# EAGLE board beeb816_mk2b (EAGLE 6.4)
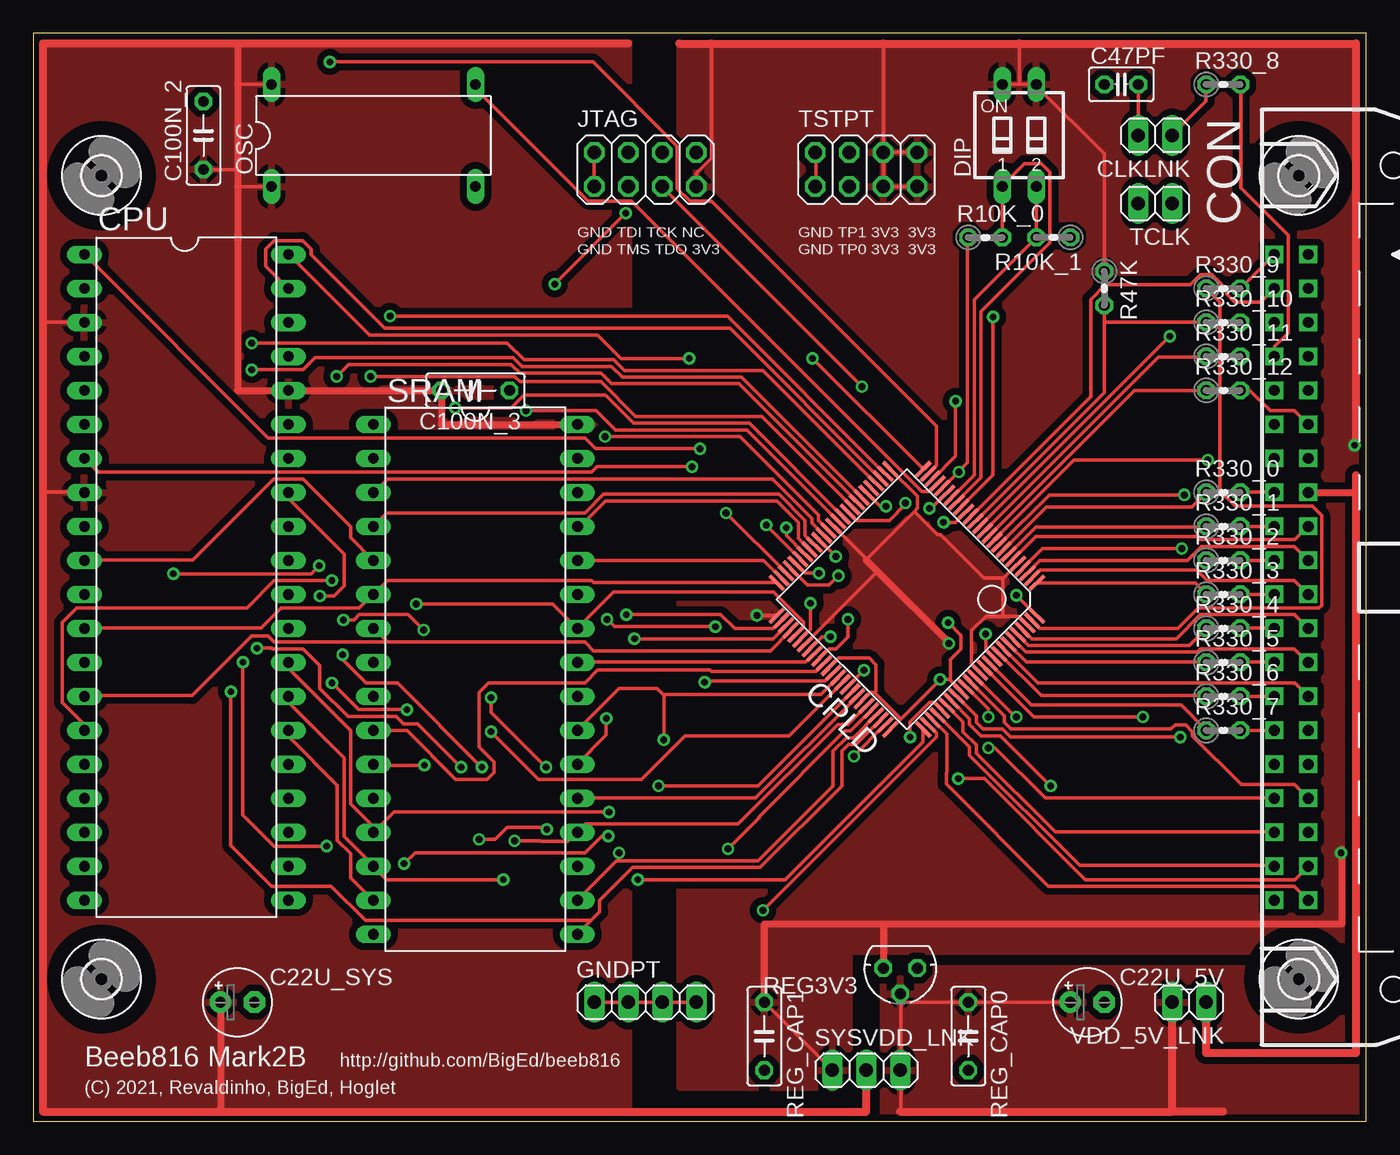
[diagram p0: board, top side]
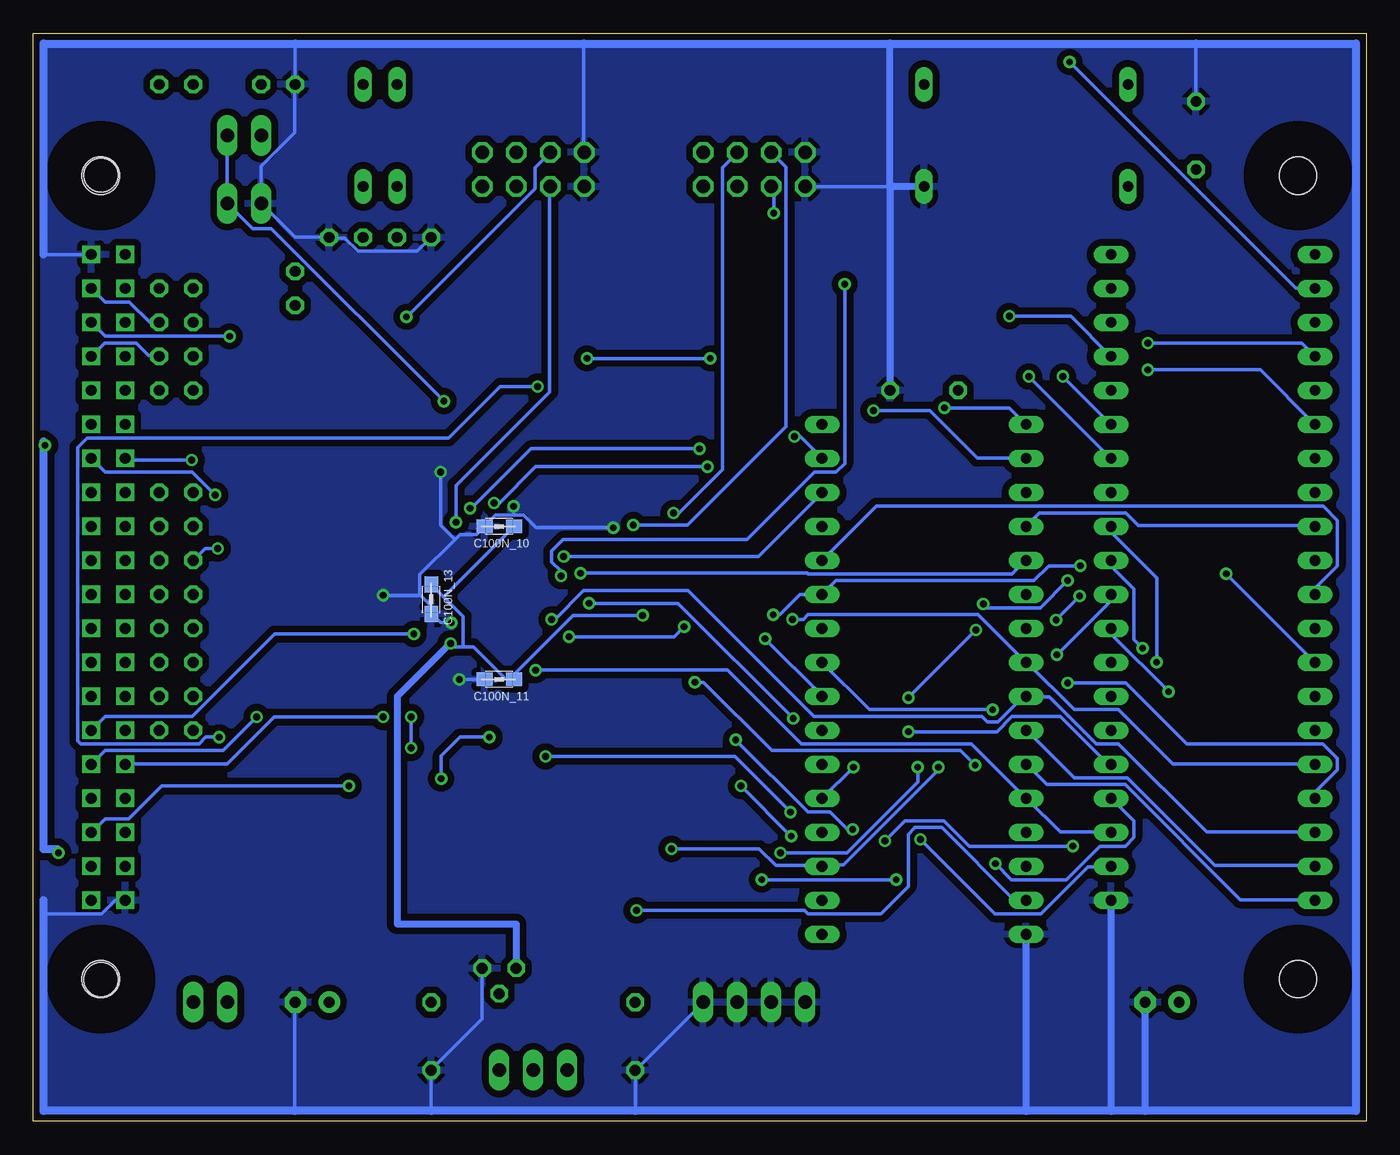
[diagram p1: board, bottom side, seen from below]

Size 99.57 x 81.28 mm. Coordinates in mm from the lower left corner, seen from the top.
Outline: 0,0 99.57,0 99.57,81.28 0,81.28 0,0
Copper layers (1*16): Top 0.035mm / dielectric 1.5mm / Bottom 0.035mm
Design rules "design_rules_smd": minimum track width 10mil, minimum drill 20mil, track to track 7mil, track to pad 8mil, pad to pad 7mil, via to via 20mil, smd to smd 7mil, copper to edge 15mil, drill to drill 8mil, minimum pad ring 10mil, minimum via ring 8mil, stop-mask expansion 4mil, vias tented up to drill 0mil, thermal gap 15mil
Net classes: 0 signal: width 0.202 mm, clearance 0.2 mm; 1 supply: width 0.202 mm, clearance 0.2 mm

## Footprints (pad centres in the part's own frame; a part is rotated, then mirrored left to right if it is on the bottom)
E2,5-5 = drill 0.813 pad 1.6: + -1.27,0 | drill 0.813 pad 1.6 octagon: - 1.27,0
C025-025X050 = drill 0.813 octagon: 1 -1.27,0; 2 1.27,0
C050-025X075 = drill 0.813 octagon: 1 -2.54,0; 2 2.54,0
0805 = smd 1.2 x 1: 1 -1.1,0; 2 1.1,0
1X02 = drill 1.016 long: 1 -1.27,0; 2 1.27,0
3M_40L = drill 0.813 square: 1 -24.13,-5.08; 2 -24.13,-2.54; 3 -21.59,-5.08; 4 -21.59,-2.54; 5 -19.05,-5.08; 6 -19.05,-2.54; 7 -16.51,-5.08; 8 -16.51,-2.54; 9 -13.97,-5.08; 10 -13.97,-2.54; 11 -11.43,-5.08; 12 -11.43,-2.54; 13 -8.89,-5.08; 14 -8.89,-2.54; 15 -6.35,-5.08; 16 -6.35,-2.54; 17 -3.81,-5.08; 18 -3.81,-2.54; 19 -1.27,-5.08; 20 -1.27,-2.54; 21 1.27,-5.08; 22 1.27,-2.54; 23 3.81,-5.08; 24 3.81,-2.54; 25 6.35,-5.08; 26 6.35,-2.54; 27 8.89,-5.08; 28 8.89,-2.54; 29 11.43,-5.08; 30 11.43,-2.54; 31 13.97,-5.08; 32 13.97,-2.54; 33 16.51,-5.08; 34 16.51,-2.54; 35 19.05,-5.08; 36 19.05,-2.54; 37 21.59,-5.08; 38 21.59,-2.54; 39 24.13,-5.08; 40 24.13,-2.54 | hole 2.54: -30.048,-3.277; 30.048,-3.277
TQFP100 = smd 0.27 x 1.5: 1 -6,-7.75; 2 -5.5,-7.75; 3 -5,-7.75; 4 -4.5,-7.75; 5 -4,-7.75; 6 -3.5,-7.75; 7 -3,-7.75; 8 -2.5,-7.75; 9 -2,-7.75; 10 -1.5,-7.75; 11 -1,-7.75; 12 -0.5,-7.75; 13 0,-7.75; 14 0.5,-7.75; 15 1,-7.75; 16 1.5,-7.75; 17 2,-7.75; 18 2.5,-7.75; 19 3,-7.75; 20 3.5,-7.75; 21 4,-7.75; 22 4.5,-7.75; 23 5,-7.75; 24 5.5,-7.75; 25 6,-7.75; 51 6,7.75; 52 5.5,7.75; 53 5,7.75; 54 4.5,7.75; 55 4,7.75; 56 3.5,7.75; 57 3,7.75; 58 2.5,7.75; 59 2,7.75; 60 1.5,7.75; 61 1,7.75; 62 0.5,7.75; 63 0,7.75; 64 -0.5,7.75; 65 -1,7.75; 66 -1.5,7.75; 67 -2,7.75; 68 -2.5,7.75; 69 -3,7.75; 70 -3.5,7.75; 71 -4,7.75; 72 -4.5,7.75; 73 -5,7.75; 74 -5.5,7.75; 75 -6,7.75 | smd 1.5 x 0.27: 26 7.75,-6; 27 7.75,-5.5; 28 7.75,-5; 29 7.75,-4.5; 30 7.75,-4; 31 7.75,-3.5; 32 7.75,-3; 33 7.75,-2.5; 34 7.75,-2; 35 7.75,-1.5; 36 7.75,-1; 37 7.75,-0.5; 38 7.75,0; 39 7.75,0.5; 40 7.75,1; 41 7.75,1.5; 42 7.75,2; 43 7.75,2.5; 44 7.75,3; 45 7.75,3.5; 46 7.75,4; 47 7.75,4.5; 48 7.75,5; 49 7.75,5.5; 50 7.75,6; 76 -7.75,6; 77 -7.75,5.5; 78 -7.75,5; 79 -7.75,4.5; 80 -7.75,4; 81 -7.75,3.5; 82 -7.75,3; 83 -7.75,2.5; 84 -7.75,2; 85 -7.75,1.5; 86 -7.75,1; 87 -7.75,0.5; 88 -7.75,0; 89 -7.75,-0.5; 90 -7.75,-1; 91 -7.75,-1.5; 92 -7.75,-2; 93 -7.75,-2.5; 94 -7.75,-3; 95 -7.75,-3.5; 96 -7.75,-4; 97 -7.75,-4.5; 98 -7.75,-5; 99 -7.75,-5.5; 100 -7.75,-6
DIL40 = drill 0.813 long: 1 -24.13,-7.62; 2 -21.59,-7.62; 3 -19.05,-7.62; 4 -16.51,-7.62; 5 -13.97,-7.62; 6 -11.43,-7.62; 7 -8.89,-7.62; 8 -6.35,-7.62; 9 -3.81,-7.62; 10 -1.27,-7.62; 11 1.27,-7.62; 12 3.81,-7.62; 13 6.35,-7.62; 14 8.89,-7.62; 15 11.43,-7.62; 16 13.97,-7.62; 17 16.51,-7.62; 18 19.05,-7.62; 19 21.59,-7.62; 20 24.13,-7.62; 21 24.13,7.62; 22 21.59,7.62; 23 19.05,7.62; 24 16.51,7.62; 25 13.97,7.62; 26 11.43,7.62; 27 8.89,7.62; 28 6.35,7.62; 29 3.81,7.62; 30 1.27,7.62; 31 -1.27,7.62; 32 -3.81,7.62; 33 -6.35,7.62; 34 -8.89,7.62; 35 -11.43,7.62; 36 -13.97,7.62; 37 -16.51,7.62; 38 -19.05,7.62; 39 -21.59,7.62; 40 -24.13,7.62
SD4-02 = drill 0.813 long: 1 -1.27,-3.81; 2 1.27,-3.81; 3 1.27,3.81; 4 -1.27,3.81
1X04 = drill 1.016 long: 1 -3.81,0; 2 -1.27,0; 3 1.27,0; 4 3.81,0
2,8 = hole 2.8: 0,0
2X04 = drill 1.016 octagon: 1 -3.81,-1.27; 2 -3.81,1.27; 3 -1.27,-1.27; 4 -1.27,1.27; 5 1.27,-1.27; 6 1.27,1.27; 7 3.81,-1.27; 8 3.81,1.27
DIL14/4 = drill 0.813 long: 1 -7.62,-3.81; 7 7.62,-3.81; 8 7.62,3.81; 14 -7.62,3.81
0204V = drill 0.813 octagon: 1 -1.27,0; 2 1.27,0
TO92-3 = drill 0.813 octagon: A1 -1.27,0; A2 1.27,0; G 0,1.905
DIL32 = drill 0.813 long: 1 -19.05,-7.62; 2 -16.51,-7.62; 3 -13.97,-7.62; 4 -11.43,-7.62; 5 -8.89,-7.62; 6 -6.35,-7.62; 7 -3.81,-7.62; 8 -1.27,-7.62; 9 1.27,-7.62; 10 3.81,-7.62; 11 6.35,-7.62; 12 8.89,-7.62; 13 11.43,-7.62; 14 13.97,-7.62; 15 16.51,-7.62; 16 19.05,-7.62; 17 19.05,7.62; 18 16.51,7.62; 19 13.97,7.62; 20 11.43,7.62; 21 8.89,7.62; 22 6.35,7.62; 23 3.81,7.62; 24 1.27,7.62; 25 -1.27,7.62; 26 -3.81,7.62; 27 -6.35,7.62; 28 -8.89,7.62; 29 -11.43,7.62; 30 -13.97,7.62; 31 -16.51,7.62; 32 -19.05,7.62
1X03 = drill 1.016 long: 1 -2.54,0; 2 0,0; 3 2.54,0

## Placement (x,y rotation side)
C22U_5V  [E2,5-5]  78.74,8.89 0 top
C22U_SYS  [E2,5-5]  15.24,8.89 0 top
C47PF  [C025-025X050]  81.28,77.47 0 top
C100N_2  [C050-025X075]  12.7,73.66 90 top
C100N_3  [C050-025X075]  33.02,54.61 180 top
C100N_10  [0805]  64.77,44.45 0 bottom
C100N_11  [0805]  64.77,33.02 0 bottom
C100N_13  [0805]  69.85,38.99 90 bottom
CLKLNK  [1X02]  83.82,73.66 180 top
CON  [3M_40L]  97.79,40.64 270 top
CPLD  [TQFP100]  65.25,39 135 top
CPU  [DIL40]  11.43,40.64 270 top
DIP  [SD4-02]  73.66,73.66 0 top
GNDPT  [1X04]  45.72,8.89 0 top
H1  [2,8]  94.54,70.66 0 top
H2  [2,8]  94.54,10.62 0 top
H3  [2,8]  5.08,70.66 0 top
H4  [2,8]  5.08,10.62 0 top
JTAG  [2X04]  45.72,71.12 0 top
OSC  [DIL14/4]  25.4,73.66 0 top
R10K_0  [0204V]  71.12,66.04 0 top
R10K_1  [0204V]  76.2,66.04 180 top
R47K  [0204V]  80.01,62.23 270 top
R330_0  [0204V]  88.9,46.99 0 top
R330_1  [0204V]  88.9,44.45 0 top
R330_2  [0204V]  88.9,41.91 0 top
R330_3  [0204V]  88.9,39.37 0 top
R330_4  [0204V]  88.9,36.83 0 top
R330_5  [0204V]  88.9,34.29 0 top
R330_6  [0204V]  88.9,31.75 0 top
R330_7  [0204V]  88.9,29.21 0 top
R330_8  [0204V]  88.9,77.47 0 top
R330_9  [0204V]  88.9,62.23 0 top
R330_10  [0204V]  88.9,59.69 0 top
R330_11  [0204V]  88.9,57.15 0 top
R330_12  [0204V]  88.9,54.61 0 top
REG3V3  [TO92-3]  64.77,11.43 180 top
REG_CAP0  [C050-025X075]  69.85,6.35 270 top
REG_CAP1  [C050-025X075]  54.61,6.35 270 top
SRAM  [DIL32]  33.02,33.02 270 top
SYSVDD_LNK  [1X03]  62.23,3.81 0 top
TCLK  [1X02]  83.82,68.58 180 top
TSTPT  [2X04]  62.23,71.12 0 top
VDD_5V_LNK  [1X02]  86.36,8.89 180 top

## Library data of the parts
C22U_5V C22U_SYS C47PF C100N_2 C100N_3 R10K_0 R10K_1 R47K R330_0 R330_1-R330_12 REG_CAP0 REG_CAP1 = resistor
C100N_10 C100N_11 C100N_13 = wuerth-elektronik
CLKLNK GNDPT JTAG SYSVDD_LNK TCLK TSTPT VDD_5V_LNK = pinhead
CON = con-harting-ml
CPLD = ref-packages
CPU OSC SRAM = ic-package
DIP = switch-dil
H1-H4 = holes
REG3V3 = triac

## Nets
BBC_A0: CON.18 CPLD.6
BBC_A1: CON.20 CPLD.3
BBC_A2: CON.22 CPLD.2
BBC_A3: CON.24 CPLD.97
BBC_A4: CON.26 CPLD.95
BBC_A5: CON.28 CPLD.93
BBC_A6: CON.30 CPLD.91
BBC_A7: CON.32 CPLD.89
BBC_A8: CON.34 CPLD.86
BBC_A9: CON.36 CPLD.82
BBC_A10: CON.38 CPLD.80
BBC_A11: CON.40 CPLD.78
BBC_A12: CON.37 CPLD.79
BBC_A13: CON.35 CPLD.81
BBC_A14: CON.33 CPLD.85
BBC_A15: CON.31 CPLD.87
BBC_D0: CON.15 R330_0.2
BBC_D1: CON.17 R330_1.2
BBC_D2: CON.19 R330_2.2
BBC_D3: CON.21 R330_3.2
BBC_D4: CON.23 R330_4.2
BBC_D5: CON.25 R330_5.2
BBC_D6: CON.27 R330_6.2
BBC_D7: CON.29 R330_7.2
BBC_IRQB: CON.8 R330_11.2
BBC_NMIB: CON.12 R330_12.2
BBC_PHI0: CON.7 R330_8.2
BBC_PHI1: CON.6 CPLD.13
BBC_PHI2: CON.3 CPLD.15
BBC_RDY: CON.4 R330_10.2
BBC_RNW: CON.13 CPLD.10
BBC_RSTB: CON.1 R330_9.2
BBC_SYNC: CON.14 CPLD.9
CPLD_D0: CPLD.8 R330_0.1
CPLD_D1: CPLD.7 R330_1.1
CPLD_D2: CPLD.4 R330_2.1
CPLD_D3: CPLD.1 R330_3.1
CPLD_D4: CPLD.96 R330_4.1
CPLD_D5: CPLD.94 R330_5.1
CPLD_D6: CPLD.92 R330_6.1
CPLD_D7: CPLD.90 R330_7.1
CPLD_IRQB: CPLD.12 R330_11.1
CPLD_NMIB: CPLD.11 R330_12.1
CPLD_PHI0: CLKLNK.1 CPLD.23 R330_8.1 TCLK.1
CPLD_PHI0_FILT: C47PF.2 CLKLNK.2
CPLD_RDY: CPLD.14 R47K.2 R330_10.1
CPLD_RSTB: CPLD.99 R330_9.1
CPU_A0: CPLD.42 CPU.9 SRAM.4
CPU_A1: CPLD.46 CPU.10 SRAM.5
CPU_A2: CPLD.49 CPU.11 SRAM.28
CPU_A3: CPLD.50 CPU.12 SRAM.6
CPU_A4: CPLD.52 CPU.13 SRAM.27
CPU_A5: CPLD.54 CPU.14 SRAM.7
CPU_A6: CPLD.55 CPU.15 SRAM.26
CPU_A7: CPLD.58 CPU.16 SRAM.8
CPU_A8: CPLD.59 CPU.17 SRAM.25
CPU_A9: CPLD.60 CPU.18 SRAM.9
CPU_A10: CPLD.61 CPU.19 SRAM.10
CPU_A11: CPLD.63 CPU.20 SRAM.11
CPU_A12: CPLD.64 CPU.22 SRAM.23
CPU_A13: CPLD.66 CPU.23 SRAM.12
CPU_A14: CPLD.67 CPU.24
CPU_A15: CPLD.65 CPU.25
CPU_D0: CPLD.68 CPU.33 SRAM.21
CPU_D1: CPLD.70 CPU.32 SRAM.20
CPU_D2: CPLD.71 CPU.31 SRAM.19
CPU_D3: CPLD.72 CPU.30 SRAM.18
CPU_D4: CPLD.73 CPU.29 SRAM.17
CPU_D5: CPLD.74 CPU.28 SRAM.13
CPU_D6: CPLD.76 CPU.27 SRAM.14
CPU_D7: CPLD.77 CPU.26 SRAM.15
CPU_E: CPLD.33 CPU.35
CPU_IRQB: CPLD.29 CPU.4
CPU_NMIB: CPLD.32 CPU.6
CPU_PHI2: CPLD.27 CPU.37
CPU_RDY: CPLD.24 CPU.2
CPU_RNW: CPLD.34 CPU.34
CPU_RSTB: CPLD.25 CPU.40
CPU_VDA: CPLD.28 CPU.39
CPU_VPA: CPLD.35 CPU.7
CPU_VPB: CPLD.20 CPU.1
DIP0: CPLD.18 DIP.1 R10K_0.2
DIP1: CPLD.19 DIP.2 R10K_1.2
GND [supply]: C22U_5V.- C22U_SYS.- C47PF.1 C100N_2.2 C100N_3.1 C100N_10.1 C100N_11.1 C100N_13.1 CON.2 CON.39 CPLD.21 CPLD.31 CPLD.44 CPLD.62 CPLD.69 CPLD.75 CPLD.84 CPLD.100 CPU.21 GNDPT.1 GNDPT.2 GNDPT.3 GNDPT.4 JTAG.1 JTAG.2 OSC.7 R10K_0.1 R10K_1.1 REG3V3.A1 REG_CAP0.2 REG_CAP1.2 SRAM.16 TCLK.2 TSTPT.1 TSTPT.2
HSCLK: CPLD.22 OSC.8
RAM_A14: CPLD.40 SRAM.3
RAM_A15: CPLD.39 SRAM.31
RAM_A16: CPLD.37 SRAM.2
RAM_A17: CPLD.41 SRAM.30
RAM_A18: CPLD.36 SRAM.1
RAM_CEB: CPLD.56 SRAM.22
RAM_OEB: CPLD.53 SRAM.24
RAM_WEB: CPLD.43 SRAM.29
TCK: CPLD.48 JTAG.6
TDI: CPLD.45 JTAG.4
TDO: CPLD.83 JTAG.5
TMS: CPLD.47 JTAG.3
TP0: CPLD.16 TSTPT.3
TP1: CPLD.17 TSTPT.4
VDD_3V3 [supply]: C100N_10.2 C100N_11.2 C100N_13.2 CPLD.5 CPLD.26 CPLD.38 CPLD.51 CPLD.57 CPLD.88 CPLD.98 DIP.3 DIP.4 JTAG.7 R47K.1 REG3V3.A2 REG_CAP1.1 SYSVDD_LNK.1 TSTPT.5 TSTPT.6 TSTPT.7 TSTPT.8
VDD_5V [supply]: C22U_5V.+ REG3V3.G REG_CAP0.1 SYSVDD_LNK.3 VDD_5V_LNK.2
VDD_5V_IN [supply]: CON.16 VDD_5V_LNK.1
VDD_SYS [supply]: C22U_SYS.+ C100N_2.1 C100N_3.2 CPU.3 CPU.8 CPU.36 OSC.1 OSC.14 SRAM.32 SYSVDD_LNK.2

## Tracks (layer width: path | path; a pad name or v marks a point on that pad's centre or on a via)
BBC_A0
  Top 0.254: CON.18 94.25,43.45 87.2,43.45 86.95,43.7 74.9,43.7 73.25,42.05 CPLD.6
BBC_A1
  Top 0.254: CPLD.3 74.25,40.95 75.2,41.9 86.2,41.9 87.25,42.95 94.2,42.95 95.2,41.95 CON.20
BBC_A2
  Top 0.254: CPLD.2 74.65,40.6 75.25,41.2 86.9,41.2 87.7,40.4 94.2,40.4 95.2,39.4 CON.22
BBC_A3
  Top 0.254: CPLD.97 73.95,36.7 74.6,36.05 85.4,36.05 87.2,37.85 94.2,37.85 95.2,36.85 CON.24
BBC_A4
  Top 0.254: CPLD.95 73.25,35.95 74.15,35.05 86.95,35.05 87.2,35.3 94.2,35.3 95.2,34.3 CON.26
BBC_A5
  Top 0.254: CON.28 94.25,32.75 75.05,32.75 CPLD.93
BBC_A6  (via drill 0.51)
  Top 0.254: v71.15,36.4 71.15,35.2 71.75,34.6 CPLD.91
  Bottom 0.254: v71.15,36.4 81.55,36.4 87.7,30.25 94.2,30.25 95.2,29.25 CON.30
BBC_A7  (via drill 0.51)
  Top 0.254: v82.9,30.2 74.75,30.2 71.1,33.85 CPLD.89
  Bottom 0.254: v82.9,30.2 85.4,27.7 94.2,27.7 95.2,26.7 CON.32
BBC_A8
  Top 0.254: CPLD.86 70.05,32.8 72.55,30.3 72.55,29.8 73.05,29.3 85,29.3 85.3,29.6 86.1,29.6 86.6,29.1 86.6,28.8 90.25,25.15 94.2,25.15 95.2,24.15 CON.34
BBC_A9  (via drill 0.51)
  Top 0.254: v76,25.05 72.25,28.8 70.8,28.8 69.95,29.65 69.95,30.05 68.65,31.35 CPLD.82
  Bottom 0.254: v76,25.05 90,25.05 92.45,22.6 94.2,22.6 95.2,21.6 CON.36
BBC_A10  (via drill 0.51)
  Top 0.254: v65.5,28.7 65.5,29.85 66.95,31.3 67.3,31.3 CPLD.80 | v69.1,25.6 71.05,25.6 78.6,18.05 94.25,18.05 CON.38
  Bottom 0.254: v65.5,28.7 67.7,28.7 69.1,27.3 v69.1,25.6
BBC_A11
  Top 0.254: CPLD.78 67.2,30 68.25,28.95 68.25,26.05 68.2,26 68.2,25.2 75.85,17.55 94.2,17.55 95.2,16.55 CON.40
BBC_A12
  Top 0.254: CPLD.79 69.95,27.95 69.95,27.35 78.2,19.1 92.7,19.1 CON.37
BBC_A13
  Top 0.254: CPLD.81 68.3,31 69.45,29.85 69.45,29.1 70.45,28.1 70.45,27.5 76.35,21.6 CON.35
BBC_A14  (via drill 0.51)
  Top 0.254: v71.35,30.2 71.35,30.8 69.7,32.45 CPLD.85 | v71.35,27.9 71.85,27.9 75.6,24.15 92.7,24.15 CON.33
  Bottom 0.254: v71.35,27.9 v71.35,30.2
BBC_A15  (via drill 0.51)
  Top 0.254: v73.45,30.2 73.35,30.2 70.4,33.15 CPLD.87
  Bottom 0.254: v73.45,30.2 81.6,30.2 85.1,26.7 92.7,26.7 CON.31
BBC_D0
  Top 0.254: R330_0.2 90.2,47 CON.15
BBC_D1
  Top 0.254: CON.17 R330_1.2
BBC_D2
  Top 0.254: R330_2.2 90.2,41.9 CON.19
BBC_D3
  Top 0.254: R330_3.2 90.2,39.35 92.7,39.35 CON.21
BBC_D4
  Top 0.254: R330_4.2 90.2,36.85 92.7,36.85 CON.23
BBC_D5
  Top 0.254: R330_5.2 90.2,34.3 CON.25
BBC_D6
  Top 0.254: CON.27 R330_6.2
BBC_D7
  Top 0.254: R330_7.2 90.2,29.2 CON.29
BBC_IRQB
  Bottom 0.254: CON.8 94.25,58.15 91.9,58.15 90.95,57.2 90.2,57.2 R330_11.2
BBC_NMIB
  Top 0.254: R330_12.2 90.2,54.6 90.9,54.6 92.4,53.1 94.2,53.1 95.2,52.1 CON.12
BBC_PHI0
  Top 0.254: CON.7 92.75,57.2 92.75,57.9 93.75,58.9 93.75,66.2 90.2,69.75 90.2,77.45 R330_8.2
BBC_PHI1  (via drill 0.51)
  Top 0.254: v84.9,58.65 70.75,44.5 CPLD.13
  Bottom 0.254: v84.9,58.65 94.2,58.65 95.2,59.65 CON.6
BBC_PHI2
  Top 0.254: CPLD.15 70.05,45.2 79,54.15 79,61.4 80.1,62.5 86.45,62.5 87.2,63.25 88.05,63.25 89.15,62.15 89.15,61.8 89.75,61.2 91.7,61.2 92.7,62.2 CON.3
BBC_RDY
  Bottom 0.254: R330_10.2 90.2,59.7 90.9,59.7 92.4,61.2 94.2,61.2 95.2,62.2 CON.4
BBC_RNW  (via drill 0.51)
  Top 0.254: v87.75,49.4 77.75,49.4 71.8,43.45 CPLD.10
  Bottom 0.254: v87.75,49.4 92.6,49.4 92.7,49.5 CON.13
BBC_RSTB
  Top 0.254: R330_9.2 90.2,62.25 92.7,64.75 CON.1
BBC_SYNC  (via drill 0.51)
  Top 0.254: v86,46.8 75.9,46.8 72.15,43.05 CPLD.9
  Bottom 0.254: v86,46.8 87.7,48.5 94.2,48.5 95.2,49.5 CON.14
CPLD_D0
  Top 0.254: CPLD.8 75.7,45.9 86.55,45.9 87.6,46.95 R330_0.1
CPLD_D1
  Top 0.254: CPLD.7 72.9,42.4 74.9,44.4 87.6,44.4 R330_1.1
CPLD_D2  (via drill 0.51)
  Top 0.254: v85.8,42.8 75.4,42.8 CPLD.4
  Bottom 0.254: v85.8,42.8 86.75,42.8 87.6,41.95 R330_2.1
CPLD_D3
  Top 0.254: R330_3.1 86.8,40.2 75,40.2 CPLD.1
CPLD_D4
  Top 0.254: R330_4.1 86.35,35.55 74.35,35.55 73.6,36.3 CPLD.96
CPLD_D5
  Top 0.254: CPLD.94 72.9,35.6 74.2,34.3 87.6,34.3 R330_5.1
CPLD_D6
  Top 0.254: CPLD.92 72.15,34.95 75.3,31.8 87.6,31.8 R330_6.1
CPLD_D7
  Top 0.254: CPLD.90 71.45,34.2 74.55,31.1 85.75,31.1 87.6,29.25 R330_7.1
CPLD_IRQB
  Top 0.254: CPLD.12 71.1,44.15 84.05,57.1 87.6,57.1 R330_11.1
CPLD_NMIB
  Top 0.254: CPLD.11 71.45,43.8 82.25,54.6 87.6,54.6 R330_12.1
CPLD_PHI0  (via drill 0.51)
  Top 0.254: R330_8.1 87.6,77.45 87.6,76.2 85.1,73.7 CLKLNK.1 | v68.9,53.8 68.9,49.7 67.2,48 CPLD.23
  Bottom 0.254: v68.9,53.8 81.8,66.7 83.2,66.7 85.05,68.55 TCLK.1 85.1,68.7 CLKLNK.1
CPLD_PHI0_FILT
  Top 0.254: CLKLNK.2 C47PF.2
CPLD_RDY
  Top 0.254: 80,59.7 R47K.2 | 80,59.7 80,54.45 70.4,44.85 CPLD.14 | 80,59.7 87.6,59.7 R330_10.1
CPLD_RSTB
  Top 0.254: CPLD.99 74.65,37.4 74.65,37.35 75.2,36.8 85.5,36.8 87.05,38.35 96.05,38.35 96.25,38.55 96.25,45.25 95.55,45.95 89.8,45.95 88.65,47.1 88.65,61.2 87.65,62.2 R330_9.1
CPU_A0
  Top 0.254: SRAM.4 26.4,45.45 41.2,45.45 42.6,46.85 55.7,46.85 57.65,44.9 57.65,43.75 58.35,43.05 CPLD.42
  Bottom 0.254: SRAM.4 24.4,45.45 17.95,45.45 17,44.5 3.85,44.5 CPU.9
CPU_A1  (via drill 0.51)
  Top 0.254: v58.7,40.95 57.65,40.95 CPLD.46 | CPU.10 3.85,41.95 11.9,41.95 17.95,48 20.15,48 23.7,44.45 23.7,43.6 25.35,41.95 SRAM.5
  Bottom 0.254: v58.7,40.95 41.75,40.95 41.7,40.9 26.45,40.9 25.45,41.9 SRAM.5
CPU_A2
  Top 0.254: CPLD.49 55.85,40.6 54.55,41.9 SRAM.28
  Bottom 0.254: SRAM.28 36.6,45.95 3.2,45.95 2.15,44.9 2.15,41.5 3.8,39.85 3.8,39.4 CPU.11
CPU_A3
  Top 0.254: CPLD.50 55.5,40.25 41.85,40.25 41.7,40.4 26.45,40.4 25.45,39.4 SRAM.6 25.3,39.3 24.35,38.35 18.5,38.35 17,36.85 3.85,36.85 CPU.12
CPU_A4  (via drill 0.51)
  Top 0.254: v44.3,37.85 51.35,37.85 52.4,36.8 55.25,36.8 55.85,37.4 CPLD.52 | v10.45,40.9 20.75,40.9 v21.35,41.5
  Bottom 0.254: v44.3,37.85 43.8,37.85 42.3,39.35 40.65,39.35 SRAM.27 40.55,39.45 39.6,40.4 24.8,40.4 23.7,41.5 v21.35,41.5 | v10.45,40.9 3.85,34.3 CPU.13
CPU_A5
  Top 0.254: 26.38,35.88 25.45,36.8 SRAM.7 | 26.38,35.88 26.45,35.8 41.2,35.8 41.85,35.15 55.05,35.15 CPLD.54 | CPU.14 3.85,31.8 11.85,31.8 16.3,36.25 17.55,36.25 18,35.8 26.3,35.8 26.38,35.88
CPU_A6  (via drill 0.51)
  Top 0.254: CPLD.55 57.55,36.95 57.55,37.3 55.3,39.55 43.35,39.55 40.65,36.85 SRAM.26 40.55,36.9 38.8,38.65 v28.6,38.65 | v22.3,40.4 18,40.4 15.95,38.35 3.25,38.35 2.15,37.25 2.15,31.3 3.8,29.65 3.8,29.25 CPU.15
  Bottom 0.254: v22.3,40.4 24.35,38.35 28.3,38.35 v28.6,38.65
CPU_A7  (via drill 0.51)
  Top 0.254: v59.55,36.2 58.9,36.2 CPLD.58 | v50.95,36.95 43.4,36.95 v42.85,37.5
  Bottom 0.254: v59.55,36.2 51.7,36.2 v50.95,36.95 | v42.85,37.5 42.05,37.5 41.7,37.85 29,37.85 25.45,34.3 SRAM.8 25.3,34.25 21.8,30.75 18.5,30.75 14.45,26.7 3.85,26.7 CPU.16
CPU_A8  (via drill 0.51)
  Top 0.254: CPLD.59 58.35,34.95 57.7,34.3 SRAM.25 | v22.3,32.75 24.3,30.75 v27.9,30.75
  Bottom 0.254: v22.3,32.75 17.95,32.75 13.4,28.2 3.25,28.2 2.15,27.1 2.15,26.25 3.8,24.6 3.8,24.15 CPU.17 | v27.9,30.75 37.1,30.75 SRAM.25
CPU_A9  (via drill 0.51)
  Top 0.254: v60.85,37.5 60.85,36.2 59.95,35.3 59.45,35.3 58.75,34.6 CPLD.60
  Bottom 0.254: v60.85,37.5 60.6,37.5 58.45,39.65 50.65,39.65 41.25,30.25 28.7,30.25 28.3,29.85 27.5,29.85 25.65,31.7 25.45,31.7 SRAM.9 25.3,31.7 23.65,31.7 20.15,28.2 18.5,28.2 11.9,21.6 3.85,21.6 CPU.18
CPU_A10
  Top 0.254: CPLD.61 59.05,34.2 58.45,33.6 50.65,33.6 50.55,33.7 42.15,33.7 41.2,32.75 34,32.75 33.3,32.05 33.3,27.95 34.4,26.85 34.4,26.05 33.9,25.55 31.55,25.55 27.9,29.2 25.45,29.2 SRAM.10
  Bottom 0.254: CPU.19 3.85,19.1 11.3,19.1 17.85,25.65 21.8,25.65 25.35,29.2 SRAM.10
CPU_A11  (via drill 0.51)
  Top 0.254: v50.15,32.8 50.25,32.9 59.15,32.9 59.75,33.5 CPLD.63 | v29.2,26.6 25.5,26.6 25.45,26.65 SRAM.11
  Bottom 0.254: v50.15,32.8 49.5,32.8 44.4,27.7 30.3,27.7 v29.2,26.6 | CPU.20 3.85,16.55 9.4,16.55 18,25.15 23.85,25.15 25.35,26.65 SRAM.11
CPU_A12  (via drill 0.51)
  Top 0.254: 47.1,31.9 47.05,31.9 46.6,32.35 43.75,32.35 40.65,29.25 SRAM.23 | 47.1,31.9 58.85,31.9 60.1,33.15 CPLD.64 | v33.3,21.05 34.5,21.05 35.4,21.95 38.2,21.95 v38.35,21.8 | 47.1,31.9 v47.1,28.5
  Bottom 0.254: v33.3,21.05 27.75,15.5 24.3,15.5 20.8,19 19.1,19 CPU.22 | v38.35,21.8 38.75,21.8 40.05,23.1 41.7,23.1 v47.1,28.5
CPU_A13  (via drill 0.51)
  Top 0.254: v62.05,33.7 60.85,32.5 CPLD.66
  Bottom 0.254: v62.05,33.7 47.7,33.7 42.2,28.2 29.5,28.2 25.45,24.15 SRAM.12 25.3,24.05 22.85,21.6 19.1,21.6 CPU.23
CPU_A14  (via drill 0.51)
  Top 0.254: v46.7,25.05 54.15,25.05 61.2,32.1 CPLD.67 | v42.95,21.3 42.45,21.3 41.2,20.05 28.5,20.05 v27.7,19.25
  Bottom 0.254: v42.95,21.3 v46.7,25.05 | v27.7,19.25 26.5,18.05 22.4,18.05 19.9,20.55 18,20.55 17.35,21.2 17.35,22.45 19,24.1 CPU.24
CPU_A15  (via drill 0.51)
  Top 0.254: v34.2,29.1 37.75,25.55 45.45,25.55 48.7,28.8 56.45,28.8 60.45,32.8 CPLD.65
  Bottom 0.254: v34.2,29.1 27.6,29.1 26.45,30.25 22.85,30.25 19.3,26.7 19.1,26.7 CPU.25
CPU_D0  (via drill 0.51)
  Top 0.254: CPLD.68 53.95,24.15 40.65,24.15 SRAM.21 | v21.4,39.25 22.45,39.25 23.2,40 23.2,42.4 19.1,46.5 19.1,46.95 CPU.33 | v23.15,37.45 23.95,37.45 24.35,37.85 28,37.85 v29.15,36.7 | v34.2,31.65 34.2,30.55 v38.3,26.45
  Bottom 0.254: v21.4,39.25 23.15,37.5 v23.15,37.45 | v34.2,31.65 v29.15,36.7 | v38.3,26.45 40.6,24.15 SRAM.21
CPU_D1  (via drill 0.51)
  Top 0.254: CPLD.70 62.2,31 60.85,29.65 60.1,29.65 52.65,22.2 41.25,22.2 SRAM.20 40.55,21.55 39.9,20.9 37.95,20.9 37.9,20.95 v35.95,20.95 | v15.65,34.3 15.65,22.9 18,20.55 v21.9,20.55
  Bottom 0.254: v15.65,34.3 15.65,40.6 19,43.95 19,44.4 CPU.32 | v21.9,20.55 29.65,20.55 31.55,22.45 34.45,22.45 v35.95,20.95
CPU_D2  (via drill 0.51)
  Top 0.254: v51.9,20.35 54.2,22.65 54.2,22.75 60.6,29.15 61.05,29.15 62.55,30.65 CPLD.71 | v16.7,35.35 17.8,35.35 17.85,35.3 20.15,35.3 21.4,34.05 21.4,32.35 23.5,30.25 27.1,30.25 27.65,29.7 28.7,29.7 v31.95,26.45
  Bottom 0.254: v51.9,20.35 45.35,20.35 44.1,19.1 40.65,19.1 SRAM.19 40.55,19.15 39.05,19.15 31.95,26.25 v31.95,26.45 | v16.7,35.35 17.35,36 17.35,39.75 19,41.4 19,41.9 CPU.31
CPU_D3  (via drill 0.51)
  Top 0.254: 43.75,19.45 43.55,19.45 40.65,16.55 SRAM.18 | 43.75,19.45 54.15,19.45 59.75,25.05 59.75,27.65 60.75,28.65 61.25,28.65 CPLD.72 | v23.1,34.85 23.1,34.5 24.85,32.75 27.2,32.75 v33.5,26.45 | 43.75,19.45 v43.75,20.05
  Bottom 0.254: v23.1,34.85 19.1,38.85 19.1,39.35 CPU.30 | v33.5,26.45 33.5,25.35 38.8,20.05 v43.75,20.05
CPU_D4  (via drill 0.51)
  Top 0.254: 41.58,14.93 40.65,14 SRAM.17 | 41.58,14.93 42.3,15.65 42.3,16.5 44.75,18.95 54.3,18.95 60.4,25.05 60.4,27.65 60.9,28.15 61.45,28.15 63.3,30 CPLD.73 | v14.75,32.1 14.75,20.6 17.8,17.55 22.25,17.55 24.8,15 41.5,15 41.58,14.93
  Bottom 0.254: v14.75,32.1 19,36.35 19,36.8 CPU.29
CPU_D5  (via drill 0.51)
  Top 0.254: v61.3,27.25 61.3,27.3 63.6,29.6 63.65,29.6 CPLD.74 | v43,23.1 26.95,23.1 25.45,21.6 SRAM.13 25.55,21.85 23.7,23.7 23.7,29.2 19.1,33.8 19.1,34.25 CPU.28
  Bottom 0.254: v61.3,27.25 47.15,27.25 v43,23.1
CPU_D6  (via drill 0.51)
  Top 0.254: v45.15,18.05 56.15,18.05 66.45,28.35 66.45,29.25 CPLD.76 | v35.1,18.05 26.4,18.05 SRAM.14 25.35,19.15 23.2,21.3 23.2,27.15 19.1,31.25 19.1,31.7 CPU.27
  Bottom 0.254: v35.1,18.05 v45.15,18.05
CPU_D7  (via drill 0.51)
  Top 0.254: v54.5,15.75 67.45,28.7 67.45,29 66.85,29.6 CPLD.77 | CPU.26 19.1,29.2 19.1,28.7 22.7,25.1 22.7,21 23.7,20 23.7,18.2 25.35,16.55 SRAM.15
  Bottom 0.254: v54.5,15.75 41.95,15.75 41.7,15.5 36.25,15.5 34.2,17.55 34.2,21.45 33.7,21.95 31.7,21.95 26.3,16.55 25.45,16.55 SRAM.15
CPU_E  (via drill 0.51)
  Top 0.254: v22.65,55.65 23.55,56.55 35.7,56.55 36.35,55.9 42.4,55.9 43.2,55.1 52.7,55.1 CPLD.33
  Bottom 0.254: v22.65,55.65 19.1,52.1 CPU.35
CPU_IRQB  (via drill 0.51)
  Top 0.254: v16.3,58.15 35.4,58.15 36.65,56.9 43.35,56.9 44.15,56.1 54.5,56.1 CPLD.29
  Bottom 0.254: v16.3,58.15 4.8,58.15 3.85,57.2 CPU.4
CPU_NMIB  (via drill 0.51)
  Top 0.254: v16.3,56.15 20.15,56.15 21.05,57.05 35.85,57.05 36.5,56.4 43.2,56.4 44,55.6 52.9,55.6 61.85,46.65 CPLD.32
  Bottom 0.254: v16.3,56.15 7.9,56.15 3.85,52.1 CPU.6
CPU_PHI2  (via drill 0.51)
  Top 0.254: v26.65,60.15 51.85,60.15 63.6,48.4 63.65,48.4 CPLD.27
  Bottom 0.254: v26.65,60.15 22.05,60.15 CPU.37
CPU_RDY  (via drill 0.51)
  Top 0.254: v22.15,79.15 41.8,79.15 48.1,72.85 48.1,69.7 49.05,68.75 50.65,68.75 67.45,51.95 67.45,49 66.85,48.4 CPLD.24
  Bottom 0.254: v22.15,79.15 5.25,62.25 3.85,62.25 CPU.2
CPU_RNW  (via drill 0.51)
  Top 0.254: v25.2,55.65 35.95,55.65 36.35,55.25 42.4,55.25 45,52.65 54.45,52.65 61.2,45.9 CPLD.34
  Bottom 0.254: v25.2,55.65 19.1,49.55 CPU.34
CPU_RSTB  (via drill 0.51)
  Top 0.254: v58.2,57 66.45,48.75 CPLD.25 | v49,57 43.9,57 42.15,58.75 25.1,58.75 19.1,64.75 CPU.40
  Bottom 0.254: v49,57 v58.2,57
CPU_VDA
  Top 0.254: CPLD.28 63.3,48 52.05,59.25 26.25,59.25 20.75,64.75 20.75,65.15 20.1,65.8 18,65.8 17.35,65.15 17.35,63.9 19,62.25 CPU.39
CPU_VPA  (via drill 0.51)
  Top 0.254: v65.15,46.2 65.15,46.1 63.95,44.9 61.45,44.9 60.85,45.5 CPLD.35 | v49.2,48.9 42.1,48.9 41.7,48.5 4.85,48.5 3.85,49.5 CPU.7
  Bottom 0.254: v65.15,46.2 64.75,46.2 62.05,48.9 v49.2,48.9
CPU_VPB  (via drill 0.51)
  Top 0.254: v66.95,45.8 67.1,45.8 CPLD.20 | v49.8,50.25 42,50.25 41.2,51.05 17.55,51.05 3.85,64.75 CPU.1
  Bottom 0.254: v66.95,45.8 66.85,45.8 62.4,50.25 v49.8,50.25
DIP0
  Top 0.254: CPLD.18 70.8,48.1 70.8,60.5 75.95,65.65 75.95,70.9 75.3,71.55 74.05,71.55 72.4,69.9 DIP.1 72.4,69.75 R10K_0.2
DIP1
  Top 0.254: CPLD.19 68.65,46.65 70.3,48.3 70.3,61.4 74.9,66 R10K_1.2 74.95,66.15 74.95,69.8 DIP.2
GND  (via drill 0.51)
  Top 0.254: 68.45,33 v67.75,33 64.83,30.07 | 68.45,33 69.3,32.15 CPLD.84 | 64.83,30.07 64.05,29.3 CPLD.75 | 62.85,32.05 62.55,32.05 CPLD.69 | 64.83,30.07 62.85,32.05 | CPLD.62 59.45,33.9 60.15,34.6 62.45,34.6 62.95,34.1 62.95,32.1 62.85,32.05 | v56.25,44.35 56.25,43.75 57.6,42.4 CPLD.44 | v63.7,45.95 63.25,45.95 CPLD.31 | v73.45,39.3 74.95,37.8 CPLD.100 | v68.35,37.25 69.3,36.3 69.3,35.3 68.5,34.5 68.5,33.1 68.45,33 | 69.12,48.52 69.8,49.2 69.8,66 R10K_0.1 | 69.12,48.52 67.95,47.35 CPLD.21 | v69.15,48.5 69.12,48.52 | GNDPT.1 41.95,8.9 44.4,8.9 GNDPT.2 44.55,8.9 46.95,8.9 GNDPT.3 47.1,8.9 49.5,8.9 GNDPT.4 | TSTPT.1 58.45,69.9 58.45,72.35 TSTPT.2 | JTAG.1 41.9,69.9 41.9,72.35 JTAG.2
  Bottom 0.254: v67.75,33 65.9,33 C100N_11.1 | 70.7,39.35 69.9,38.55 69.9,37.9 C100N_13.1 69.75,37.85 69.15,37.25 v68.35,37.25 | 70.7,39.35 70.7,40.85 68.08,43.48 | 68.08,43.48 67.7,43.85 66.45,43.85 65.9,44.4 C100N_10.1 65.8,44.55 65.05,45.3 63.7,45.3 | v56.25,44.35 62,44.35 62.95,45.3 63.7,45.3 | 63.7,45.3 v63.7,45.95 | v73.45,39.3 70.8,39.3 70.7,39.35 | R10K_0.1 69.9,66 70.9,65 75.3,65 76.3,66 77.35,66 R10K_1.1 77.5,66.05 80,66.05 82.5,68.55 TCLK.2 82.55,71.35 80.05,73.85 80.05,77.35 C47PF.1 80,77.5 80,80.52 | 68.08,43.48 69.15,44.55 v69.15,48.5 | 54.6,0.76 REG_CAP1.2 54.55,3.85 49.55,8.85 GNDPT.4 | 69.85,0.76 REG_CAP0.2 69.8,3.9 66.05,7.65 66.05,11.4 REG3V3.A1 | 12.7,80.52 C100N_2.2 | 98.81,15.5 94.45,15.5 93.45,16.5 92.75,16.5 CON.39 | CON.2 95.3,64.75 98.55,64.75 98.81,64.77 | 80.05,0.76 80.05,8.85 C22U_5V.- | 35.56,69.85 JTAG.1 | 58.45,80.52 58.45,72.4 TSTPT.2
  Bottom 0.508: CPU.21 19.05,0.76 | C22U_SYS.- 16.51,0.76 | SRAM.16 25.4,0.76 | OSC.7 35.56,69.85 | 35.56,69.85 C100N_3.1 | 35.56,69.85 35.56,80.52
  Bottom 0.61: 98.81,64.77 98.81,80.52 80,80.52 58.45,80.52 35.56,80.52 12.7,80.52 0.76,80.52 0.76,0.76 16.51,0.76 19.05,0.76 25.4,0.76 54.6,0.76 69.85,0.76 80.05,0.76 98.81,0.76 98.81,15.5 98.81,16.51
  pour Bottom (isolate 0.508): 0,0 0,81.28 99.57,81.28 99.57,0
HSCLK
  Top 0.254: CPLD.22 66.95,47.05 66.4,47.05 44.7,68.75 41.45,68.75 33.05,77.15 33.05,77.45 OSC.8
RAM_A14
  Top 0.254: CPLD.40 59.05,43.8 58.15,44.7 58.15,45.05 55.2,48 26.45,48 25.45,47 SRAM.3
RAM_A15  (via drill 0.51)
  Top 0.254: v42.7,51.15 52.8,51.15 58.65,45.3 58.65,44.9 59.4,44.15 CPLD.39
  Bottom 0.254: v42.7,51.15 42.25,51.15 40.65,49.55 SRAM.31
RAM_A16  (via drill 0.51)
  Top 0.254: v36.8,53.1 42.05,53.1 43.5,51.65 53.3,51.65 60.1,44.85 CPLD.37
  Bottom 0.254: v36.8,53.1 32.6,53.1 29.05,49.55 25.45,49.55 SRAM.2
RAM_A17  (via drill 0.51)
  Top 0.254: v59.95,42.2 58.75,43.4 CPLD.41
  Bottom 0.254: v59.95,42.2 45.4,42.2 40.65,46.95 SRAM.30
RAM_A18  (via drill 0.51)
  Top 0.254: v31.5,53.3 35.7,53.3 36.65,54.25 42.75,54.25 44.85,52.15 53.5,52.15 60.45,45.2 CPLD.36
  Bottom 0.254: v31.5,53.3 26.65,53.3 25.45,52.1 SRAM.1
RAM_CEB  (via drill 0.51)
  Top 0.254: v58.05,38.7 58.05,36.75 CPLD.56 | v42.8,30.1 42.8,28.85 40.65,26.7 SRAM.22
  Bottom 0.254: v58.05,38.7 51.4,38.7 v42.8,30.1
RAM_OEB  (via drill 0.51)
  Top 0.254: v44.9,36.05 55.25,36.05 56.25,37.05 CPLD.53
  Bottom 0.254: v44.9,36.05 40.65,31.8 SRAM.24
RAM_WEB
  Top 0.254: CPLD.43 57.15,43.55 57.15,44.75 55.55,46.35 42.75,46.35 40.9,44.5 40.65,44.5 SRAM.29
TCK  (via drill 0.51)
  Top 0.254: v51.75,45.45 56.25,40.95 CPLD.48
  Bottom 0.254: v51.75,45.45 51.35,45.45 48.1,48.7 48.1,71.25 47,72.35 JTAG.6
TDI  (via drill 0.51)
  Top 0.254: v54.75,44.55 57.25,42.05 CPLD.45
  Bottom 0.254: v54.75,44.55 50.7,44.55 43.35,51.9 43.35,71.3 44.4,72.35 JTAG.4
TDO  (via drill 0.51)
  Top 0.254: v85.7,28.7 73,28.7 72.4,29.3 70.95,29.3 70.45,29.8 70.45,30.3 69,31.75 CPLD.83 | v61.9,54.9 47,69.8 JTAG.5
  Bottom 0.254: v85.7,28.7 86.7,28.7 87.2,28.2 96.05,28.2 96.25,28.4 96.25,50.35 95.55,51.05 68.55,51.05 64.7,54.9 v61.9,54.9
TMS  (via drill 0.51)
  Top 0.254: v60.15,40.75 59.45,40.05 57.85,40.05 CPLD.47 | v44.25,67.85 v38.95,62.55
  Bottom 0.254: v60.15,40.75 60.15,41.1 60.85,41.8 60.85,42.6 60,43.45 46.25,43.45 41.2,48.5 39.6,48.5 38.95,49.15 v38.95,62.55 | v44.25,67.85 44.25,69.65 JTAG.3
TP0  (via drill 0.51)
  Top 0.254: v68,44.75 68.9,44.75 69.65,45.5 CPLD.16
  Bottom 0.254: v68,44.75 68,47.5 61,54.5 61,69.8 TSTPT.3
TP1  (via drill 0.51)
  Top 0.254: v71.7,60.1 71.7,48.3 69.3,45.9 CPLD.17
  Bottom 0.254: v71.7,60.1 62.1,69.7 62.1,71.25 TSTPT.4
VDD_3V3  (via drill 0.51)
  Top 0.254: 72.45,37.7 73.65,37.7 74.25,37.1 CPLD.98 | 72.45,37.7 71.15,37.7 70.1,36.65 70.1,34.15 70.7,33.55 CPLD.88 | 72.45,40.55 CPLD.5 | 72.45,37.7 72.45,40.55 | 63.07,41.07 CPLD.57 | CPLD.38 59.8,44.45 62.15,42.1 62.23,41.91 62.35,42.1 65.83,45.58 | 65.83,45.58 66.05,45.8 66.05,46.7 64.05,48.7 CPLD.26 | 65.83,45.58 67.55,43.85 67.75,43.85 71,40.6 72.35,40.6 72.45,40.55 | v54.05,37.8 55.5,37.8 CPLD.51 | REG_CAP1.1 SYSVDD_LNK.1 | v68.4,35.7 68.42,35.72 | 73.65,77.5 74.9,77.5 DIP.3 74.95,77.35 80,72.3 80,63.55 R47K.1 | 73.65,77.5 72.4,77.5 DIP.4 | TSTPT.7 TSTPT.5 TSTPT.6 | TSTPT.8 66,72.4 63.6,72.4 TSTPT.6 | 50.65,80.52 50.65,71.95 49.55,70.85 49.55,69.9 JTAG.7 | 63.5,80.52 TSTPT.6 | 73.65,80.52 73.65,77.5 | v98.7,50.5 98.81,50.8 | v97.7,20.05 97.79,20.05
  Top 0.508: REG_CAP1.1 54.61,14.73 63.5,14.73 | 63.5,14.73 97.79,14.73 97.79,20.05 97.79,20.32 | 63.5,14.73 REG3V3.A2 | 68.58,35.56 68.42,35.72 63.07,41.07 62.23,41.91
  Top 0.61: 48.26,80.52 50.65,80.52 63.5,80.52 73.65,80.52 98.81,80.52 98.81,50.8
  Bottom 0.254: 67.45,35.45 68.35,35.45 68.58,35.56 v68.4,35.7 | 67.45,35.45 66.7,35.45 64.3,33.05 63.7,33.05 C100N_11.2 63.9,33.15 59.25,37.8 v54.05,37.8 | 68.92,39.17 67.45,37.7 67.45,35.45 | 68.92,39.17 69.8,40.05 C100N_13.2 | 68.92,39.17 63.7,44.4 C100N_10.2 | v98.7,50.5 98.81,50.5 | v97.7,20.05 97.79,20.32
  Bottom 0.508: 68.58,35.56 72.39,31.75 72.39,14.73 63.5,14.73 REG3V3.A2
  Bottom 0.61: 97.79,20.32 98.81,20.32 98.81,50.5 98.81,50.8
  pour Top (isolate 0.508): 48.26,2.54 60.96,2.54 60.96,12.7 98.81,12.7 98.81,81.28 48.26,81.28
VDD_5V
  Top 0.254: C22U_5V.+ 77.45,8.9 69.95,8.9 REG_CAP0.1 69.8,8.9 64.9,8.9 REG3V3.G 64.8,9.5 64.8,3.85 SYSVDD_LNK.3 64.8,3.7 64.8,0.71
  Top 0.61: 64.77,0.71 64.8,0.71 85.09,0.71 | 88.9,0.71 85.09,0.71 | 85.09,0.71 VDD_5V_LNK.2
  pour Top (isolate 0.508): 63.5,0 63.5,11.43 98.81,11.43 98.81,0
VDD_5V_IN
  Top 0.508: CON.16 98.81,46.99
  Top 0.61: 98.81,48.26 98.81,46.99 98.81,5.08 87.63,5.08 VDD_5V_LNK.1
VDD_SYS
  Top 0.254: 0.71,47 CPU.8 | 0.71,59.7 CPU.3 | 15.24,71.1 12.75,71.1 C100N_2.1 | 15.24,69.85 OSC.1 | 15.24,77.5 17.75,77.5 OSC.14 | 13.97,1 14,1 14,0.71
  Top 0.508: 15.24,80.52 15.24,77.5 15.24,71.1 15.24,69.85 15.24,54.61 CPU.36 C100N_3.2 30.48,52.07 SRAM.32 | C22U_SYS.+ 13.97,1 13.97,0.76
  Top 0.61: 44.45,80.52 15.24,80.52 0.71,80.52 0.71,59.7 0.71,47 0.71,0.71 14,0.71 62.23,0.71 SYSVDD_LNK.2
  pour Top (isolate 0.508): 0,0 0,81.28 44.45,81.28 44.45,0

## Text on the board
tPlace: GND TDI TCK NC | GND TP1 3V3 3V3 | GND TMS TDO 3V3 | GND TP0 3V3 3V3 | Beeb816 Mark2B | http://github.com/BigEd/beeb816 | (C) 2021, Revaldinho, BigEd, Hoglet